# Altium PCB Inteligent_IGBT.PcbDoc
Units mm, origin at the board's own origin, x right, y up, seen from the top; angles counter-clockwise.
Board outline 253.62 x 95.76 mm, 2 copper layers (Top Layer, Bottom Layer); 32 components, 20 nets, 84 pads, 0 vias.
Unrouted connection lines stored in the file: 64.
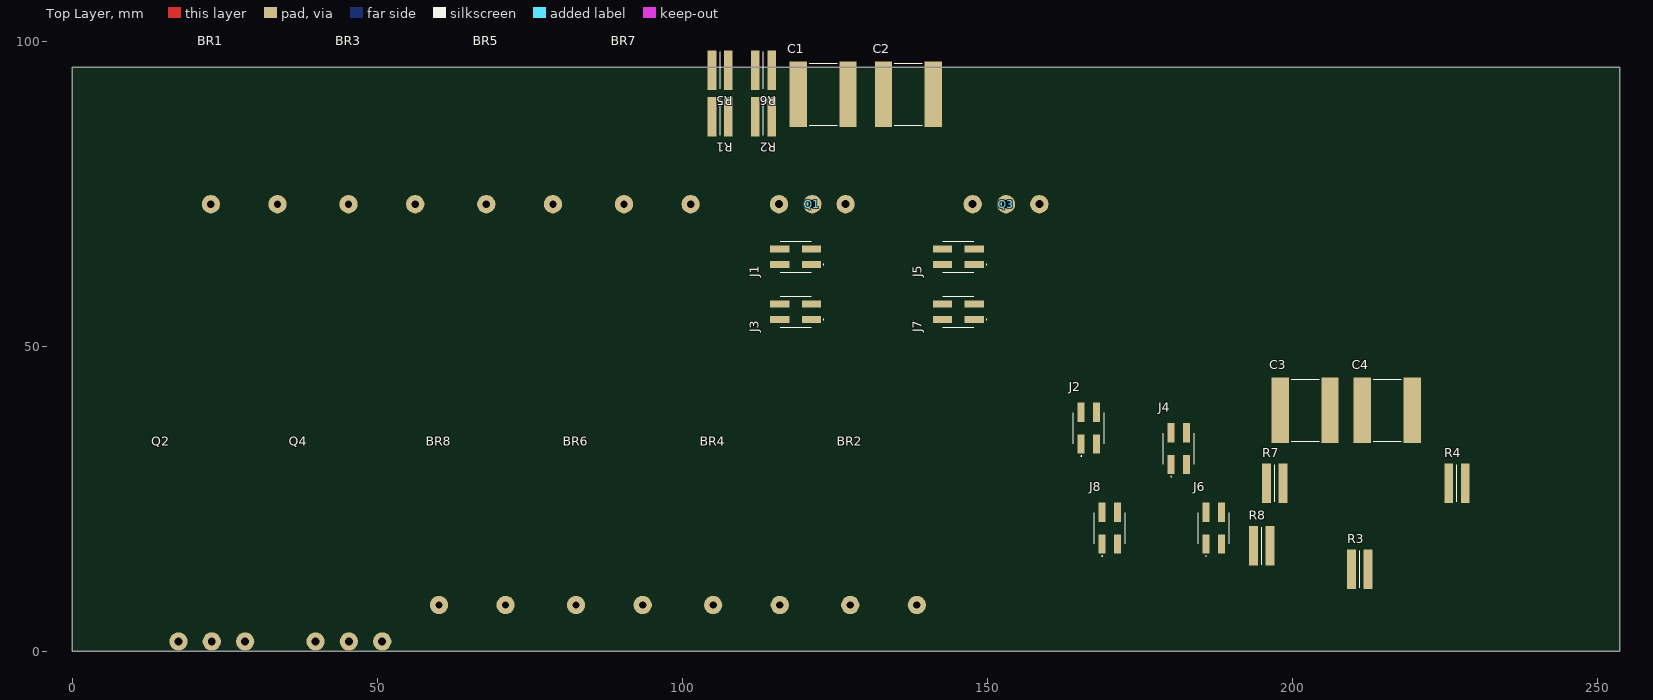
[diagram p0: Top Layer view]
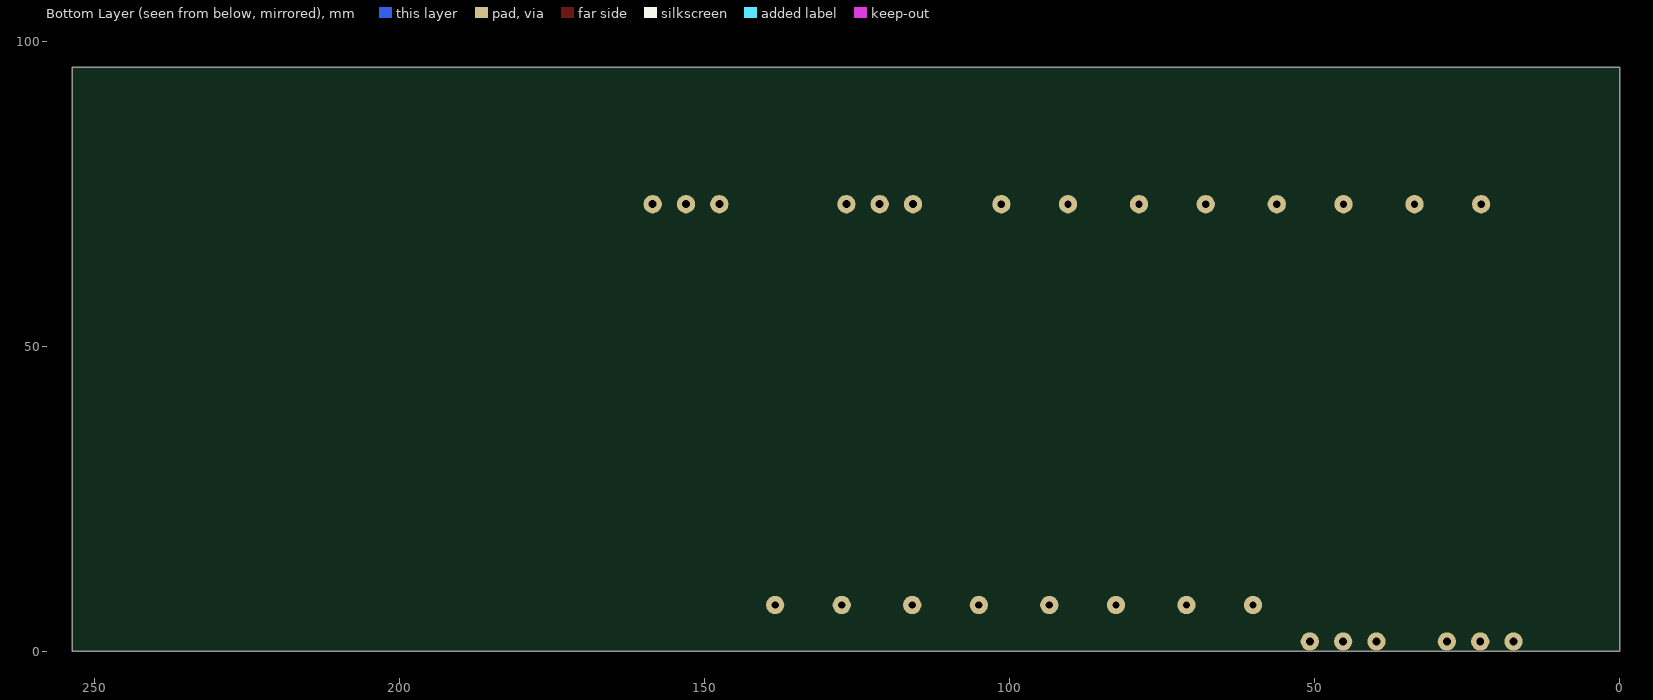
[diagram p1: Bottom Layer view, seen from below]

## Layer stack, top to bottom
Top Solder: solder mask 0.0102, Solder Resist, Dk 3.5
Top Layer: signal copper 0.0356
Dielectric 1: dielectric 0.32, FR-4, Dk 4.8
Bottom Layer: signal copper 0.0356
Bottom Solder: solder mask 0.0102, Solder Resist, Dk 3.5

## Board outline
0,0 253.619,0 253.619,95.758 0,95.758

## Design rules (kind name [scope] priority, off if disabled: settings)
Clearance [All] p1: gap=0.254 ignorepadtopadclearanceinfootprint=FALSE except(0: Arc-Hole Track-Hole SMDPad-Hole THPad-Hole Via-Hole Fill-Hole Poly-Hole Region-Hole Text-Hole)
PolygonConnect [All] p1: connectstyle=Relief reliefconductorwidth=0.254 reliefentries=4 polygonreliefangle="90 Angle" airgapwidth=0.254
RoutingVias [All] p1: holewidth=0.711 width=1.27 viastyle="Through Hole" minholewidth=0.711 minwidth=1.27 maxholewidth=0.711 maxwidth=1.27
SolderMaskExpansion [All] p1: expansion=0.102
Width [All] p1: maxlimit=0.254 minlimit=0.254 preferedwidth=0.254
30 further rules are at their usual default settings.

## Components (designator, comment, footprint, x,y, rotation, side; value= is the part's Value field where it differs from the comment)
BR1 "VS-75EPU12L-N3" VS-75EPU12L-N3 22.704,73.279 r0 top
BR2 "VS-75EPU12L-N3" VS-75EPU12L-N3 127.508,7.583 r0 top
BR3 "VS-75EPU12L-N3" VS-75EPU12L-N3 45.277,73.279 r0 top
BR4 "VS-75EPU12L-N3" VS-75EPU12L-N3 105.036,7.583 r0 top
BR5 "VS-75EPU12L-N3" VS-75EPU12L-N3 67.851,73.279 r0 top
BR6 "VS-75EPU12L-N3" VS-75EPU12L-N3 82.564,7.583 r0 top
BR7 "VS-75EPU12L-N3" VS-75EPU12L-N3 90.424,73.279 r0 top
BR8 "VS-75EPU12L-N3" VS-75EPU12L-N3 60.093,7.583 r0 top
C1 "0.22uF" FP-CKC33C-IPC_A 123.063,91.313 r0 top value="0.22 uF"
C2 "0.22uF" FP-CKC33C-IPC_A 137.033,91.313 r0 top value="0.22 uF"
C3 "0.22uF" FP-CKC33C-IPC_A 202.057,39.497 r0 top value="0.22 uF"
C4 "0.22uF" FP-CKC33C-IPC_A 215.519,39.497 r0 top value="0.22 uF"
J1 "HW-02-08-T-D-250-SM" HW0208TD250SM 118.553,64.643 r90 top
J2 "HW-02-08-T-D-250-SM" HW0208TD250SM 166.624,36.576 r0 top
J3 "HW-02-08-T-D-250-SM" HW0208TD250SM 118.553,55.626 r90 top
J4 "HW-02-08-T-D-250-SM" HW0208TD250SM 181.356,33.212 r0 top
J5 "HW-02-08-T-D-250-SM" HW0208TD250SM 145.223,64.643 r90 top
J6 "HW-02-08-T-D-250-SM" HW0208TD250SM 187.071,20.193 r0 top
J7 "HW-02-08-T-D-250-SM" HW0208TD250SM 145.223,55.626 r90 top
J8 "HW-02-08-T-D-250-SM" HW0208TD250SM 170.053,20.193 r0 top
Q1 "IXYK110N120A4" IXYK110N120A4 121.285,73.279 r0 top
Q2 "IXYK110N120A4" IXYK110N120A4 22.86,1.602 r0 top
Q3 "IXYK110N120A4" IXYK110N120A4 153.035,73.279 r0 top
Q4 "IXYK110N120A4" IXYK110N120A4 45.332,1.602 r0 top
R1 "RCL12251K00FKEG" RESC3263X80N 106.172,87.63 r180 top
R2 "RCL12251K00FKEG" RESC3263X80N 113.284,87.63 r180 top
R3 "RCL12251K00FKEG" RESC3263X80N 211.027,13.462 r0 top
R4 "RCL12251K00FKEG" RESC3263X80N 226.949,27.559 r0 top
R5 "RCL12251K00FKEG" RESC3263X80N 106.172,95.25 r180 top
R6 "RCL12251K00FKEG" RESC3263X80N 113.284,95.25 r180 top
R7 "RCL12251K00FKEG" RESC3263X80N 197.104,27.559 r0 top
R8 "RCL12251K00FKEG" RESC3263X80N 194.945,17.272 r0 top

## Footprints (in the part's own frame and the unit in brackets; to place one, negate y for a bottom-side part, rotate by r counter-clockwise, add the part's x,y. Pads: shape width x height; smd on the part's side, far side on the other; paste and mask are expansions set on the pad)
FP-CKC33C-IPC_A [mm]
  rect 2.822x10.703 smd paste+0 mask+0: 1(-4.09,0) 2(4.09,0)
  silkscreen extent -2.3,-5.1 2.3,5.1, body extent -6,-5.85 6,5.85, height 0.25
HW0208TD250SM [mm]
  rect 1.14x3.175 smd: 1(-1.27,-2.603) 2(-1.27,2.602) 3(1.27,-2.603) 4(1.27,2.602)
  silkscreen extent -2.54,-4.65 2.54,2.54, body extent -2.54,-4.08 2.54,4.08, height 12.16
IXYK110N120A4 [mm] "IGBT"
  round 3 hole 1.3: 1(-5.461,0) 2(0,0) 3(5.461,0)
  body extent -10.15,-0.3 10.15,31.3, height 5.7
RESC3263X80N [mm]
  rect 1.45x6.5 smd: 1(-1.35,0) 2(1.35,0)
  silkscreen extent 0,-3.05 0,3.05, body extent -1.6,-3.15 1.6,3.15, height 0.8
VS-75EPU12L-N3 [mm] "VS-75EPU12L-N3"
  round 3 hole 1.2: 1(0,0) 3(10.922,0)
  body extent -2.44,-0.38 13.36,25.32, height 5.4

## Part data
BR1 BR2 BR3 BR4 BR5 BR6 BR7 BR8: "Bridge Rectifier", Manufacturer_Name=Vishay, Mouser Part Number=78-VS-75EPU12L-N3, Arrow Part Number=VS-75EPU12L-N3, Arrow Price/Stock=https://www.arrow.com/en/products/vs-75epu12l-n3/vishay, Datasheet Link=https://datasheet.lcsc.com/szlcsc/1811271814_Vishay-Intertech-VS-75EPU12L-N3_C335787.pdf, Height=24.99mm, Manufacturer_Part_Number=VS-75EPU12L-N3, Mouser Price/Stock=https://www.mouser.co.uk/ProductDetail/Vishay-Semiconductors/VS-75EPU12L-N3?qs=AfeIN4OqR0CECNyPZBJseQ%3D%3D
C1 C2 C3 C4: library part CMP-03020-010018-1, "KC-LINK 3640 220NF 500V C0G", Capacitance="0.22 uF", Manufacturer=KEMET, Manufacturer Part Number=CKC33C224KCGACAUTO, Package=CKC33C, Temperature="-55°C to +150°C", Temperature Characteristic=C0G, Temperature Coefficient=30ppm/°C, Temperature Range High=+150°C, Temperature Range Low=-55°C, Tolerance=0.1, Voltage Rating=500V, Automotive=Yes, Automotive Grade="Grade 0", Category=Cap, ComponentLink2Description=Datasheet, ComponentLink2URL=https://content.kemet.com/datasheets/KEM_C1039_KC-LINK_C0G.pdf, Device Class L1="Passive Components", Device Class L2=Capacitors, Device Class L3="Ceramic Capacitors", Digikey Description="KC-LINK 3640 220NF 500V C0G", Height=2.7mm, Ipc Land Pattern Name=CAPC9301020X250, Lead Free=Yes, Material=Ceramic, Mouser Description="Cap Ceramic 0.22uF 500V C0G 10% Pad SMD 3640 150C Automotive T/R", Octopart=https://octopart.com/ckc33c224kcgacauto-kemet-88954723, RoHS=TRUE
J1 J2 J3 J4 J5 J6 J7 J8: "Connector", Manufacturer_Name=SAMTEC, Mouser Part Number=200-HW0208TD250SM, Datasheet Link=https://suddendocs.samtec.com/catalog_english/hw_sm.pdf, Height=12.06mm, Manufacturer_Part_Number=HW-02-08-T-D-250-SM, Mouser Price/Stock=https://www.mouser.com/Search/Refine.aspx?Keyword=200-HW0208TD250SM, System=Connector
Q1 Q2 Q3 Q4: "Transistor IGBT", Manufacturer_Name="IXYS SEMICONDUCTOR", Datasheet Link=https://www.littelfuse.com/~/media/electronics/datasheets/discrete_igbts/littelfuse_discrete_igbts_xpt_ixyk110n120a4_datasheet.pdf.pdf, Height=5.31mm, Manufacturer_Part_Number=IXYK110N120A4
R1 R2 R3 R4 R5 R6 R7 R8: "Resistor", Manufacturer_Name=Vishay, Mouser Part Number=71-RCL12251K00FKEG, Datasheet Link=https://www.mouser.com/datasheet/2/427/rcle3-247384.pdf, Height=0.8mm, Manufacturer_Part_Number=RCL12251K00FKEG, Mouser Price/Stock=https://www.mouser.com/Search/Refine.aspx?Keyword=71-RCL12251K00FKEG

## Nets (pads, with @x,y where several pads share a name; then routed paths per layer and width w, separated by ;. In a path a pad name is that pad's centre, name@x,y a point inside that pad or via, vN(x,y) a via of type N, cw(c..) or ccw(c..) an arc to the next point about the centre after c; other vN are vias at no path point)
H_COLLECTOR: BR1.1 BR3.1 BR5.1 BR7.1 J7.1 J7.2 J7.3 J7.4 Q1.2 Q3.2
H_EMITTER: BR2.3 BR4.3 BR6.3 BR8.3 C2.2 J3.1 Q1.3 Q3.3 R3.2 R7.2
H_GATE_1: J5.1 J5.2 J5.3 J5.4 Q3.1
H_GATE_2: J1.1 J1.2 J1.3 J1.4 Q1.1
L_COLLECTOR: J8.1 J8.2 J8.3 J8.4 Q2.2
L_EMITTER: C4.2 J4.1 Q2.3 Q4.3
L_GATE_1: J6.1 J6.2 J6.3 J6.4 Q4.1
L_GATE_2: J2.1 J2.2 J2.3 J2.4 Q2.1
NetBR1_3: BR1.3 BR3.3 BR5.3 BR7.3 R1.2 R5.2
NetBR2_1: BR2.1 BR4.1 BR6.1 BR8.1 Q4.2
NetC1_1: C1.1 R2.1 R6.1
NetC1_2: C1.2 C2.1
NetC3_1: C3.1 R4.1 R8.1
NetC3_2: C3.2 C4.1
NetJ3_2: J3.2 J3.3 J3.4
NetJ4_2: J4.2 J4.3 J4.4
NetR1_1: R1.1 R2.2
NetR3_1: R3.1 R4.2
NetR5_1: R5.1 R6.2
NetR7_1: R7.1 R8.2